# EAGLE board lpc (EAGLE 6.5.0)
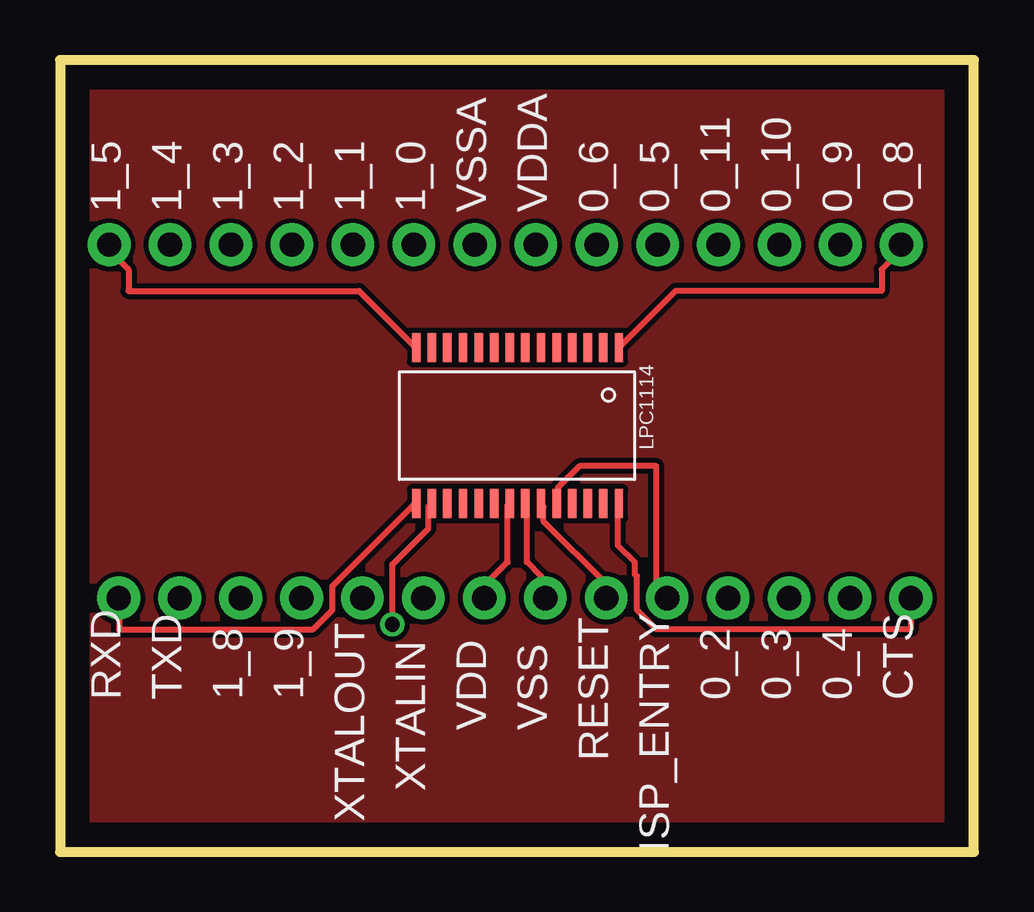
[diagram p0: board, top side]
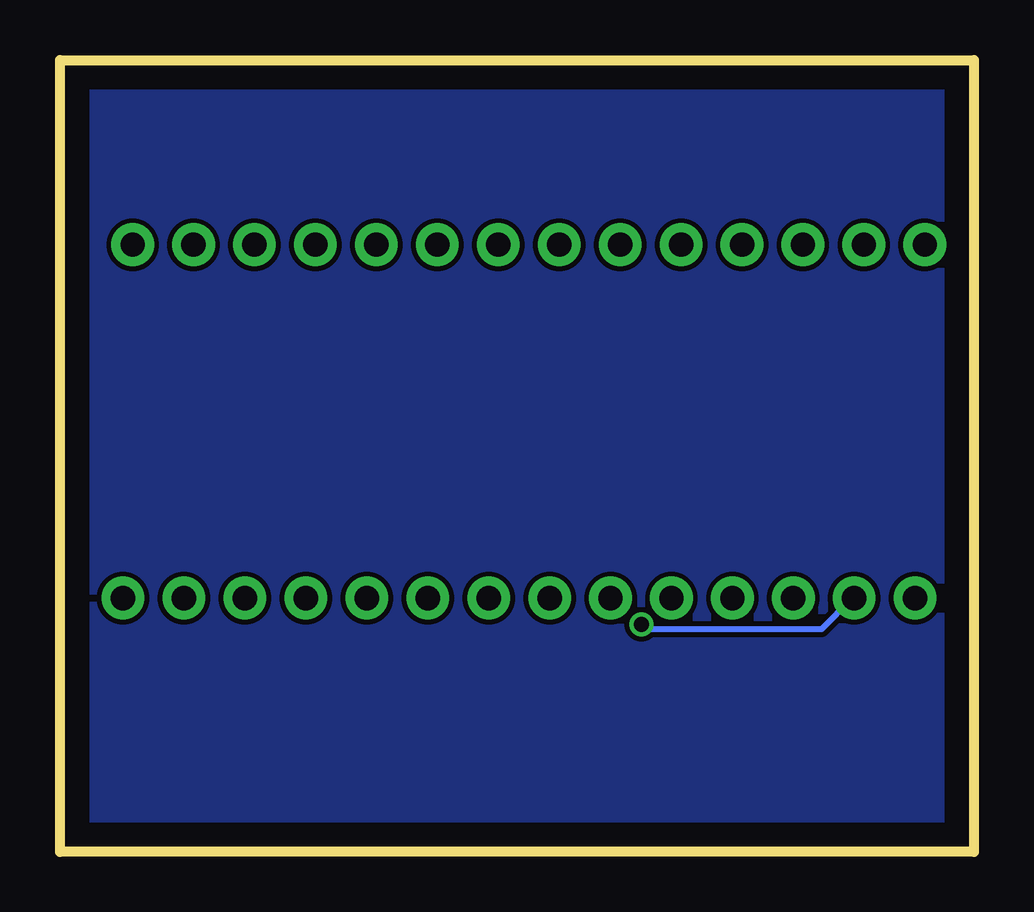
[diagram p1: board, bottom side, seen from below]

Size 38.1 x 33.02 mm. Coordinates in mm from the lower left corner, seen from the top.
Outline: 0,33.02 0,0 38.1,0 38.1,33.02 0,33.02
Copper layers (1*16): Top 0.035mm / dielectric 1.5mm / Bottom 0.035mm
Design rules "default": minimum track width 10mil, minimum drill 24mil, track to track 8mil, track to pad 8mil, pad to pad 8mil, via to via 8mil, smd to smd 8mil, copper to edge 40mil, drill to drill 8mil, minimum pad ring 10mil, minimum via ring 8mil, stop-mask expansion 4mil, vias tented up to drill 0mil, thermal gap 10mil

## Footprints (pad centres in the part's own frame; a part is rotated, then mirrored left to right if it is on the bottom)
1X14-CB = drill 1.016 pad 1.778: 1 -16.51,0; 2 -13.97,0; 3 -11.43,0; 4 -8.89,0; 5 -6.35,0; 6 -3.81,0; 7 -1.27,0; 8 1.27,0; 9 3.81,0; 10 6.35,0; 11 8.89,0; 12 11.43,0; 13 13.97,0; 14 16.51,0
MUC-LPC1114 = smd 1.2 x 0.35: 1 -3.25,4.25; 2 -3.25,3.6; 3 -3.25,2.95; 4 -3.25,2.3; 5 -3.25,1.65; 6 -3.25,1; 7 -3.25,0.35; 8 -3.25,-0.3; 9 -3.25,-0.95; 10 -3.25,-1.6; 11 -3.25,-2.25; 12 -3.25,-2.9; 13 -3.25,-3.55; 14 -3.25,-4.2; 15 3.25,-4.2; 16 3.25,-3.55; 17 3.25,-2.9; 18 3.25,-2.25; 19 3.25,-1.6; 20 3.25,-0.95; 21 3.25,-0.3; 22 3.25,0.35; 23 3.25,1; 24 3.25,1.65; 25 3.25,2.3; 26 3.25,2.95; 27 3.25,3.6; 28 3.25,4.25

## Placement (x,y rotation side)
JP1  [1X14-CB]  18.56,25.32 0 top
JP2  [1X14-CB]  18.96,10.59 180 top
U$1  MUC-LPC1114  [MUC-LPC1114]  19.05,17.78 270 top

## Library data of the parts
JP1 JP2 = adafruit
U$1 = gclue

## Nets
CTS: JP2.1 U$1.28
ISP_ENTRY: JP2.5 U$1.24
PIO0_2: U$1.25
PIO0_3: U$1.26
PIO0_4: U$1.27
PIO0_5: U$1.5
PIO0_6: U$1.6
PIO0_8: JP1.14 U$1.1
PIO0_9: U$1.2
PIO0_10: U$1.3
PIO0_11: U$1.4
PIO1_0: U$1.9
PIO1_1: U$1.10
PIO1_2: U$1.11
PIO1_3: U$1.12
PIO1_4: U$1.13
PIO1_8: U$1.17
PIO1_9: U$1.18
RESET: JP2.6 U$1.23
RTS: JP1.1 U$1.14
RXD: JP2.14 U$1.15
TXD: JP2.13 U$1.16
VDD: JP2.8 U$1.21
VDDA: U$1.7
VSS: JP2.7 U$1.22
VSSA: U$1.8
XTALIN: U$1.20
XTALOUT: U$1.19

## Tracks (layer width: path | path; a pad name or v marks a point on that pad's centre or on a via)
AGND
  pour Bottom: 0,33.02 38.1,33.02 38.1,0 0,0
CTS
  Top 0.254: U$1.28 23.26,14.49 23.26,12.79 23.96,12.09 23.96,11.59 24.06,11.49 24.06,10.09 24.86,9.29 35.46,9.29 JP2.1
GND
  pour Top: 0,33.02 38.1,33.02 38.1,0 0,0
ISP_ENTRY
  Top 0.254: U$1.24 20.76,14.59 20.76,15.19 21.66,16.09 24.86,16.09 24.86,10.99 25.26,10.59 JP2.5
PIO0_8
  Top 0.254: U$1.1 25.66,23.39 34.26,23.39 34.26,24.29 35.06,25.09 35.06,25.29 JP1.14
RESET
  Top 0.254: U$1.23 20.06,14.49 20.16,14.39 20.16,13.79 22.76,11.19 JP2.6
RTS
  Top 0.254: U$1.14 14.76,21.09 12.46,23.39 2.86,23.39 2.86,24.29 2.06,25.09 2.06,25.29 JP1.1
RXD
  Top 0.254: U$1.15 14.76,14.49 11.36,11.09 11.36,10.09 10.56,9.29 2.46,9.29 JP2.14
TXD  (via drill 0.61)
  Top 0.254: U$1.16 15.36,14.39 15.36,13.49 13.86,11.99 v13.86,9.49
  Bottom 0.254: v13.86,9.49 13.66,9.29 6.36,9.29 5.06,10.59 JP2.13
VDD
  Top 0.254: U$1.21 18.66,14.49 18.66,12.09 17.76,11.19 17.76,10.59 JP2.8
VSS
  Top 0.254: U$1.22 19.46,14.49 19.46,12.09 20.06,11.49 20.06,10.69 20.16,10.59 JP2.7

## Text on the board
tPlace: 1_5 | 1_4 | 1_3 | 1_2 | 1_1 | 1_0 | VSSA | VDDA | 0_6 | 0_5 | 0_11 | 0_10 | 0_9 | 0_8 | RXD | TXD | 1_8 | 1_9 | 0_2 | 0_3 | 0_4 | CTS | VDD | VSS | RESET | XTALIN | XTALOUT | ISP_ENTRY